# EAGLE board WHITE_LINE_FINAL_1 (EAGLE 8.2.2)
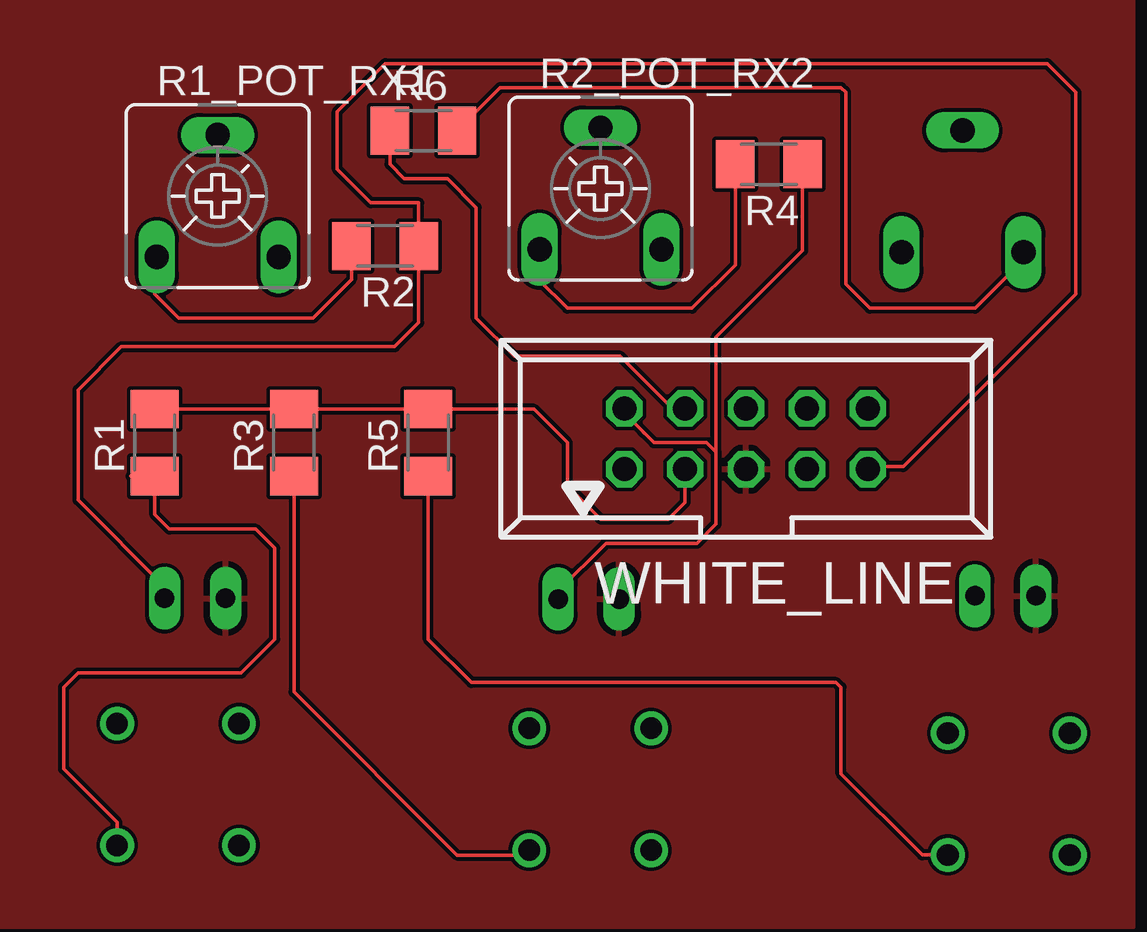
[diagram p0: board, top side]
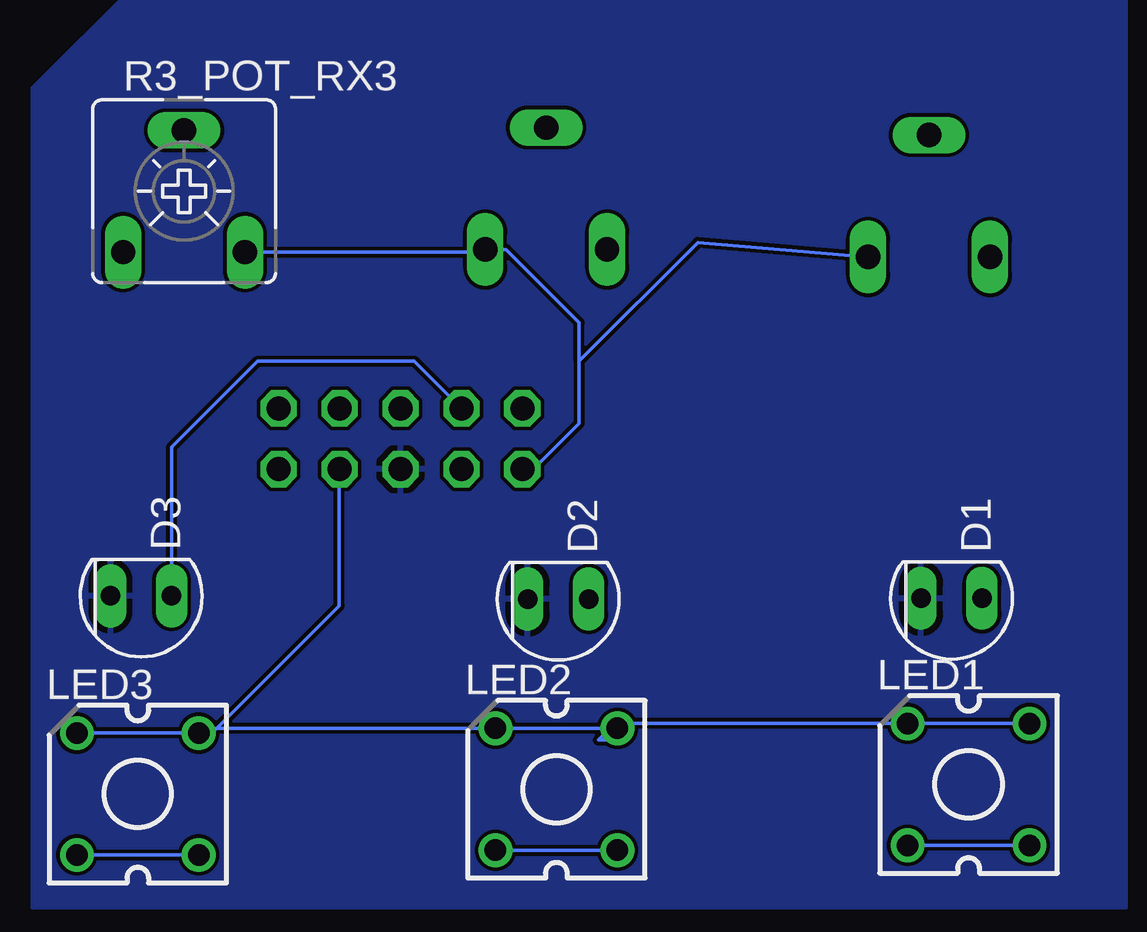
[diagram p1: board, bottom side, seen from below]

No outline drawn. Coordinates in mm, seen from the top.
Copper layers (1*16): Top 0.035mm / dielectric 1.5mm / Bottom 0.035mm
Design rules "default": minimum track width 6mil, minimum drill 0.35mm, track to track 6mil, track to pad 6mil, pad to pad 6mil, via to via 6mil, smd to smd 6mil, copper to edge 40mil, drill to drill 6mil, minimum pad ring 10mil, minimum via ring 8mil, stop-mask expansion 4mil, vias tented up to drill 0mil, thermal gap 10mil

## Footprints (pad centres in the part's own frame; a part is rotated, then mirrored left to right if it is on the bottom)
SFH206 = drill 0.813 long: A 0,-1.27; K 0,1.27
CP41B = drill 0.9 pad 1.27: 1 -2.54,2.54; 2 -2.54,-2.54; 3 2.54,-2.54; 4 2.54,2.54
M1206 = smd 1.6 x 2: 1 -1.4,0; 2 1.4,0
CA6V = drill 1.016 long: A -2.54,-2.54; E 2.54,-2.54; S 0,2.54
057-010-1 = drill 1 octagon: 1 -5.08,-1.27; 2 -5.08,1.27; 3 -2.54,-1.27; 4 -2.54,1.27; 5 0,-1.27; 6 0,1.27; 7 2.54,-1.27; 8 2.54,1.27; 9 5.08,-1.27; 10 5.08,1.27

## Placement (x,y rotation side)
D1  SFH206  [SFH206]  14.68,14.11 90 bottom
D2  SFH206  [SFH206]  31.08,14.08 90 bottom
D3  SFH206  [SFH206]  48.46,14.21 90 bottom
LED1  [CP41B]  13.97,6.35 0 bottom
LED2  [CP41B]  31.15,6.15 0 bottom
LED3  [CP41B]  48.6,5.95 0 bottom
R1  [M1206]  13,20.6 90 top
R1_POT_RX1  [CA6V]  15.62,30.88 0 top
R2  [M1206]  22.6,28.8 180 top
R2_POT_RX2  [CA6V]  31.58,31.19 0 top
R3  [M1206]  18.8,20.6 90 top
R3_POT_RX3  [CA6V]  46.67,31.08 0 bottom
R4  [M1206]  38.6,32.2 180 top
R5  [M1206]  24.4,20.6 90 top
R6  [M1206]  24.2,33.6 0 top
WHITE_LINE  057-010-1  [057-010-1]  37.65,20.76 0 top

## Library data of the parts
D1-D3 = opto-trans-siemens; MPN: SFH206K; OC_FARNELL: 1212741; OC_NEWARK: 01M8807
LED1-LED3 = led
R1-R6 = rcl
R1_POT_RX1 R2_POT_RX2 R3_POT_RX3 = pot
WHITE_LINE = con-panduit; OC_FARNELL: unknown; OC_NEWARK: unknown

## Nets
3.3V: R1.2 R3.2 R5.2 WHITE_LINE.3
5V: R1_POT_RX1.E R2_POT_RX2.E R3_POT_RX3.E WHITE_LINE.1
GND: D1.K D2.K D3.K WHITE_LINE.5
N$1: R1_POT_RX1.A R2.2
N$2: LED2.2 LED2.3 R3.1
N$3: R2_POT_RX2.A R4.2
N$5: R3_POT_RX3.A R6.2
N$7: LED3.2 LED3.3 R5.1
N$9: LED1.2 LED1.3 R1.1
N$14: WHITE_LINE.6
N$15: WHITE_LINE.8
N$16: WHITE_LINE.10
PIN_DATA_A1: LED1.1 LED1.4 LED2.1 LED2.4 LED3.1 LED3.4 WHITE_LINE.7
PIN_DATA_K0: D1.A R2.1 WHITE_LINE.9
PIN_DATA_K1: D2.A R4.1 WHITE_LINE.2
PIN_DATA_K2: D3.A R6.1 WHITE_LINE.4

## Tracks (layer width: path | path; a pad name or v marks a point on that pad's centre or on a via)
3.3V
  Top 0.152: R1.2 R3.2 R5.2 28.8,22 30.2,20.6 30.2,18.8 31.6,17.4 34.4,17.4 35.11,18.11 WHITE_LINE.3
5V
  Bottom 0.152: WHITE_LINE.1 32.11,19.49 30.2,21.4 30.2,24 | 30.2,24 30.2,25.6 33.25,28.65 R2_POT_RX2.E 34.23,28.54 R3_POT_RX3.E | R1_POT_RX1.E 25.26,28.94 30.2,24
GND
  Bottom 0.152: D2.K 32.35,14.19
  pour Bottom: 7.4,39.6 48.8,39.6 53,35.4 53,1.2 7.4,1.2
  pour Top: 5.8,41.4 53.8,41.4 53.8,0.4 5.8,0.4
N$1
  Top 0.152: R2.2 21.2,27.4 19.6,25.8 14,25.8 13,26.8 13,28.26 R1_POT_RX1.A
N$2
  Top 0.152: R3.1 18.8,10.2 25.6,3.4 28.4,3.4 LED2.3
  Bottom 0.152: LED2.2 LED2.3
N$3
  Top 0.152: R4.2 37.2,28 35.4,26.2 30.2,26.2 29,27.4 29,28.61 R2_POT_RX2.A
N$5
  Top 0.152: R3_POT_RX3.A 49.21,28.21 47.2,26.2 42.8,26.2 41.8,27.2 41.8,35.2 41.6,35.4 27.4,35.4 R6.2
N$7
  Top 0.152: LED3.3 44.99,3.41 41.6,6.8 41.6,10.4 41.4,10.6 26.2,10.6 24.4,12.4 R5.1
  Bottom 0.152: LED3.2 LED3.3
N$9
  Top 0.152: 12,19.2 R1.1 13,17.6 13.6,17 17.2,17 18,16.2 18,12.4 16.6,11 9.8,11 9.2,10.4 9.2,7 11.43,4.77 LED1.3
  Bottom 0.152: LED1.3 LED1.2
PIN_DATA_A1
  Bottom 0.152: LED1.4 LED1.1 28.71,8.89 29.4,8.2 29.1,8.2 LED2.4 LED2.1 45.86,8.69 LED3.4 | LED3.4 LED3.1 | LED3.4 45.51,8.49 40.2,13.8 WHITE_LINE.7
PIN_DATA_K0
  Top 0.152: WHITE_LINE.9 42.84,19.6 44.2,19.6 51.4,26.8 51.4,35.2 50.2,36.4 22.6,36.4 20.6,34.4 20.6,32 22,30.6 24,30.6 R2.1 24,25.6 23,24.6 11.6,24.6 9.8,22.8 9.8,18.2 13.41,14.59 D1.A
PIN_DATA_K1
  Top 0.152: 36.4,20.2 36.4,25 40,28.6 R4.1 | 36.4,20.2 36.4,17.2 35.6,16.4 31.8,16.4 29.81,14.41 D2.A | WHITE_LINE.2 32.57,21.83 33.3,21.1 | 33.4,21 33.3,21.1 | 33.3,21.1 33.8,20.6 36,20.6 36.4,20.2
PIN_DATA_K2
  Top 0.152: R6.1 22.8,32.2 23.4,31.6 25.2,31.6 26.4,30.4 26.4,25.8 28,24.2 32.4,24.2 34.57,22.03 WHITE_LINE.4
  Bottom 0.152: D3.A 47.19,20.41 43.6,24 37.08,24 WHITE_LINE.4

## Text on the board
tNames: WHITE LINE